# Altium PCB ZET6_PCB.PcbDoc
Units mil, origin at the board's own origin, x right, y up, seen from the top; angles counter-clockwise.
Board outline 3920.03 x 3605.01 mil, 2 copper layers (Top Layer, Bottom Layer); 53 components, 125 nets, 287 pads, 1 vias.
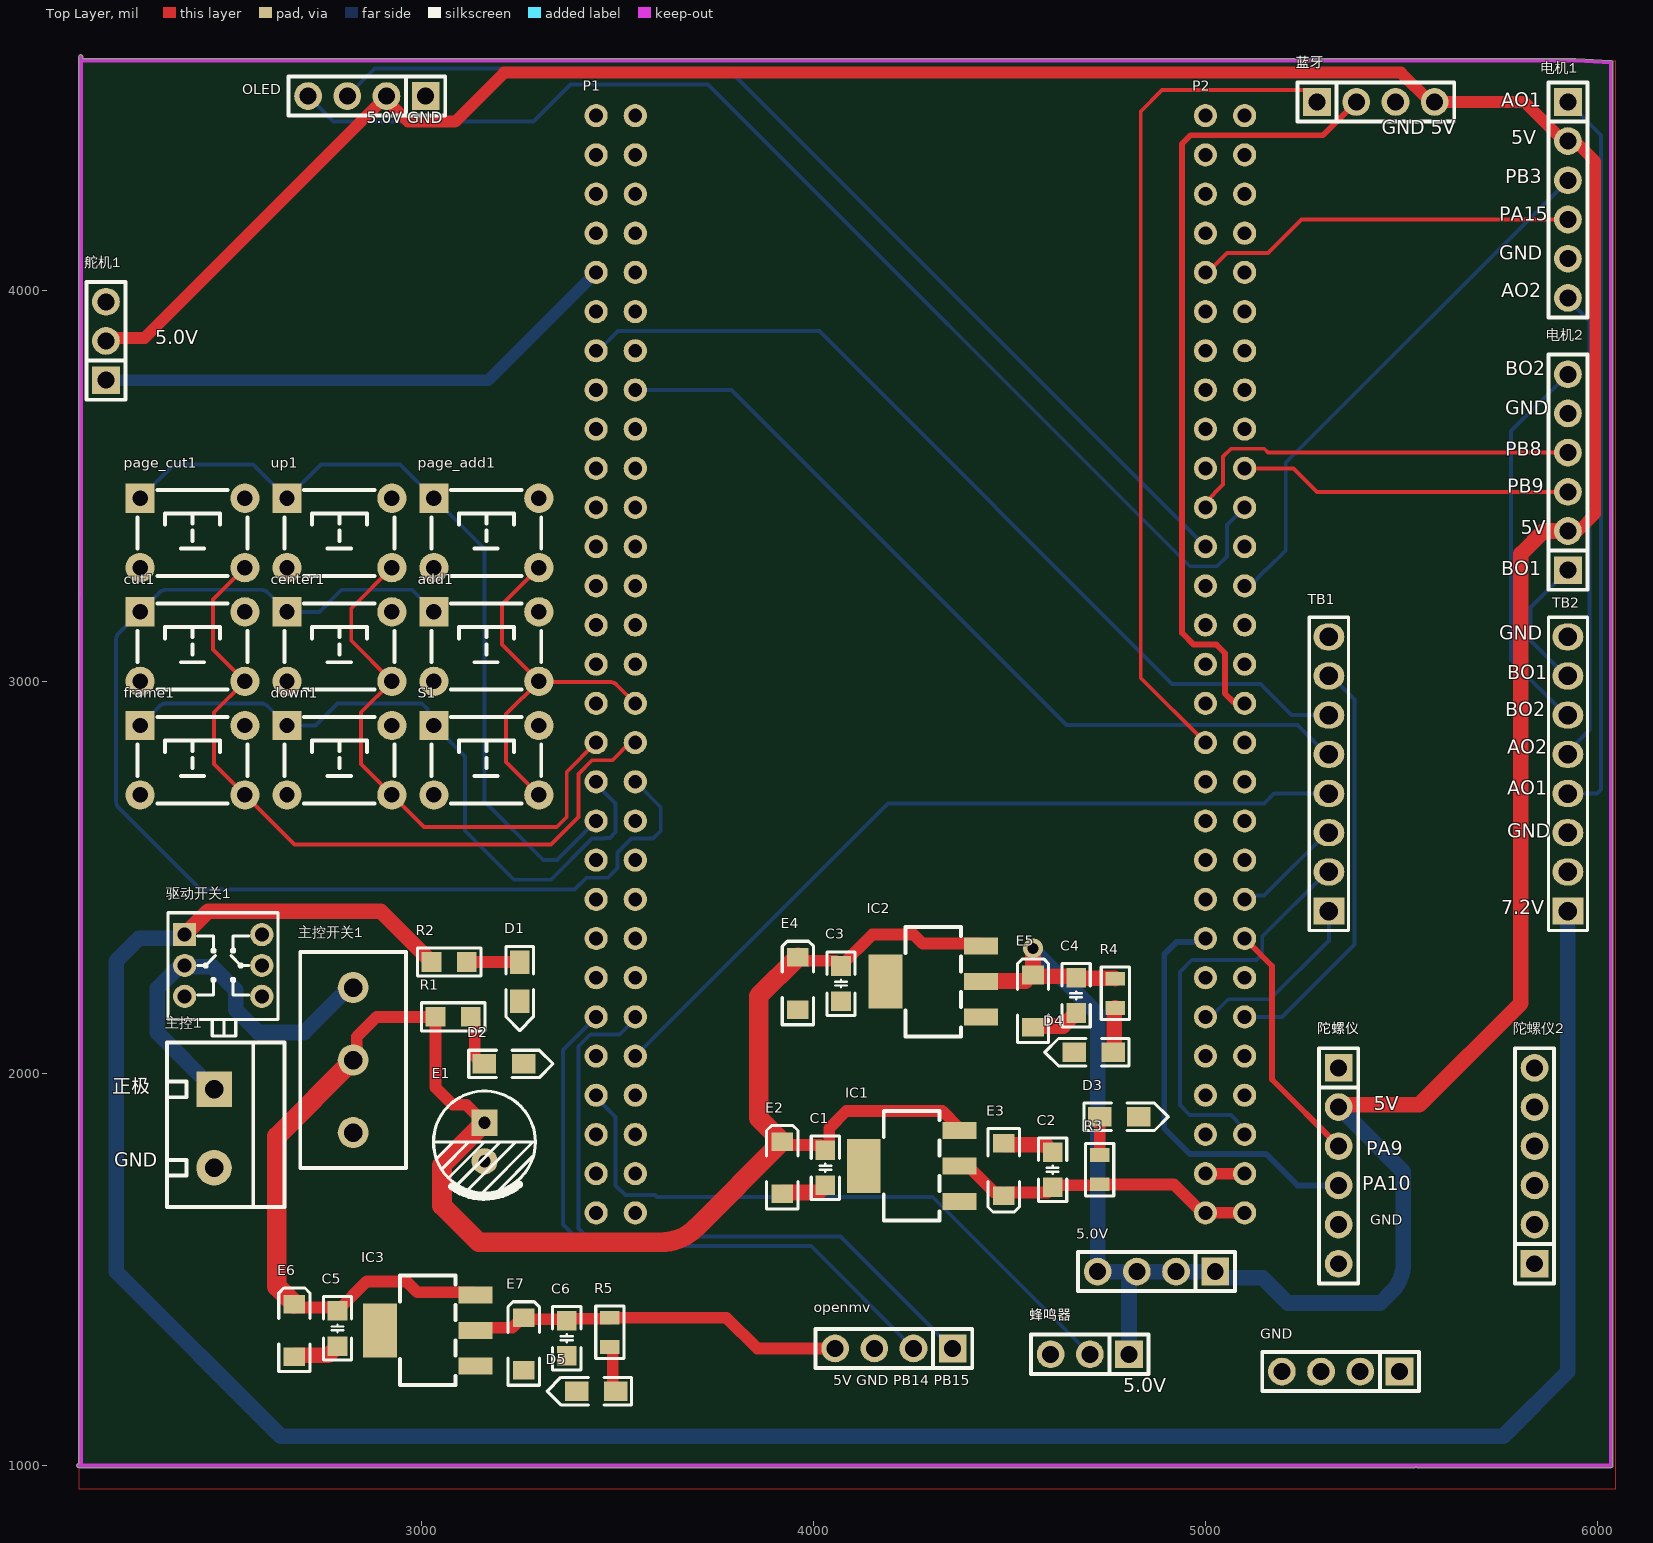
[diagram p0: Top Layer view]
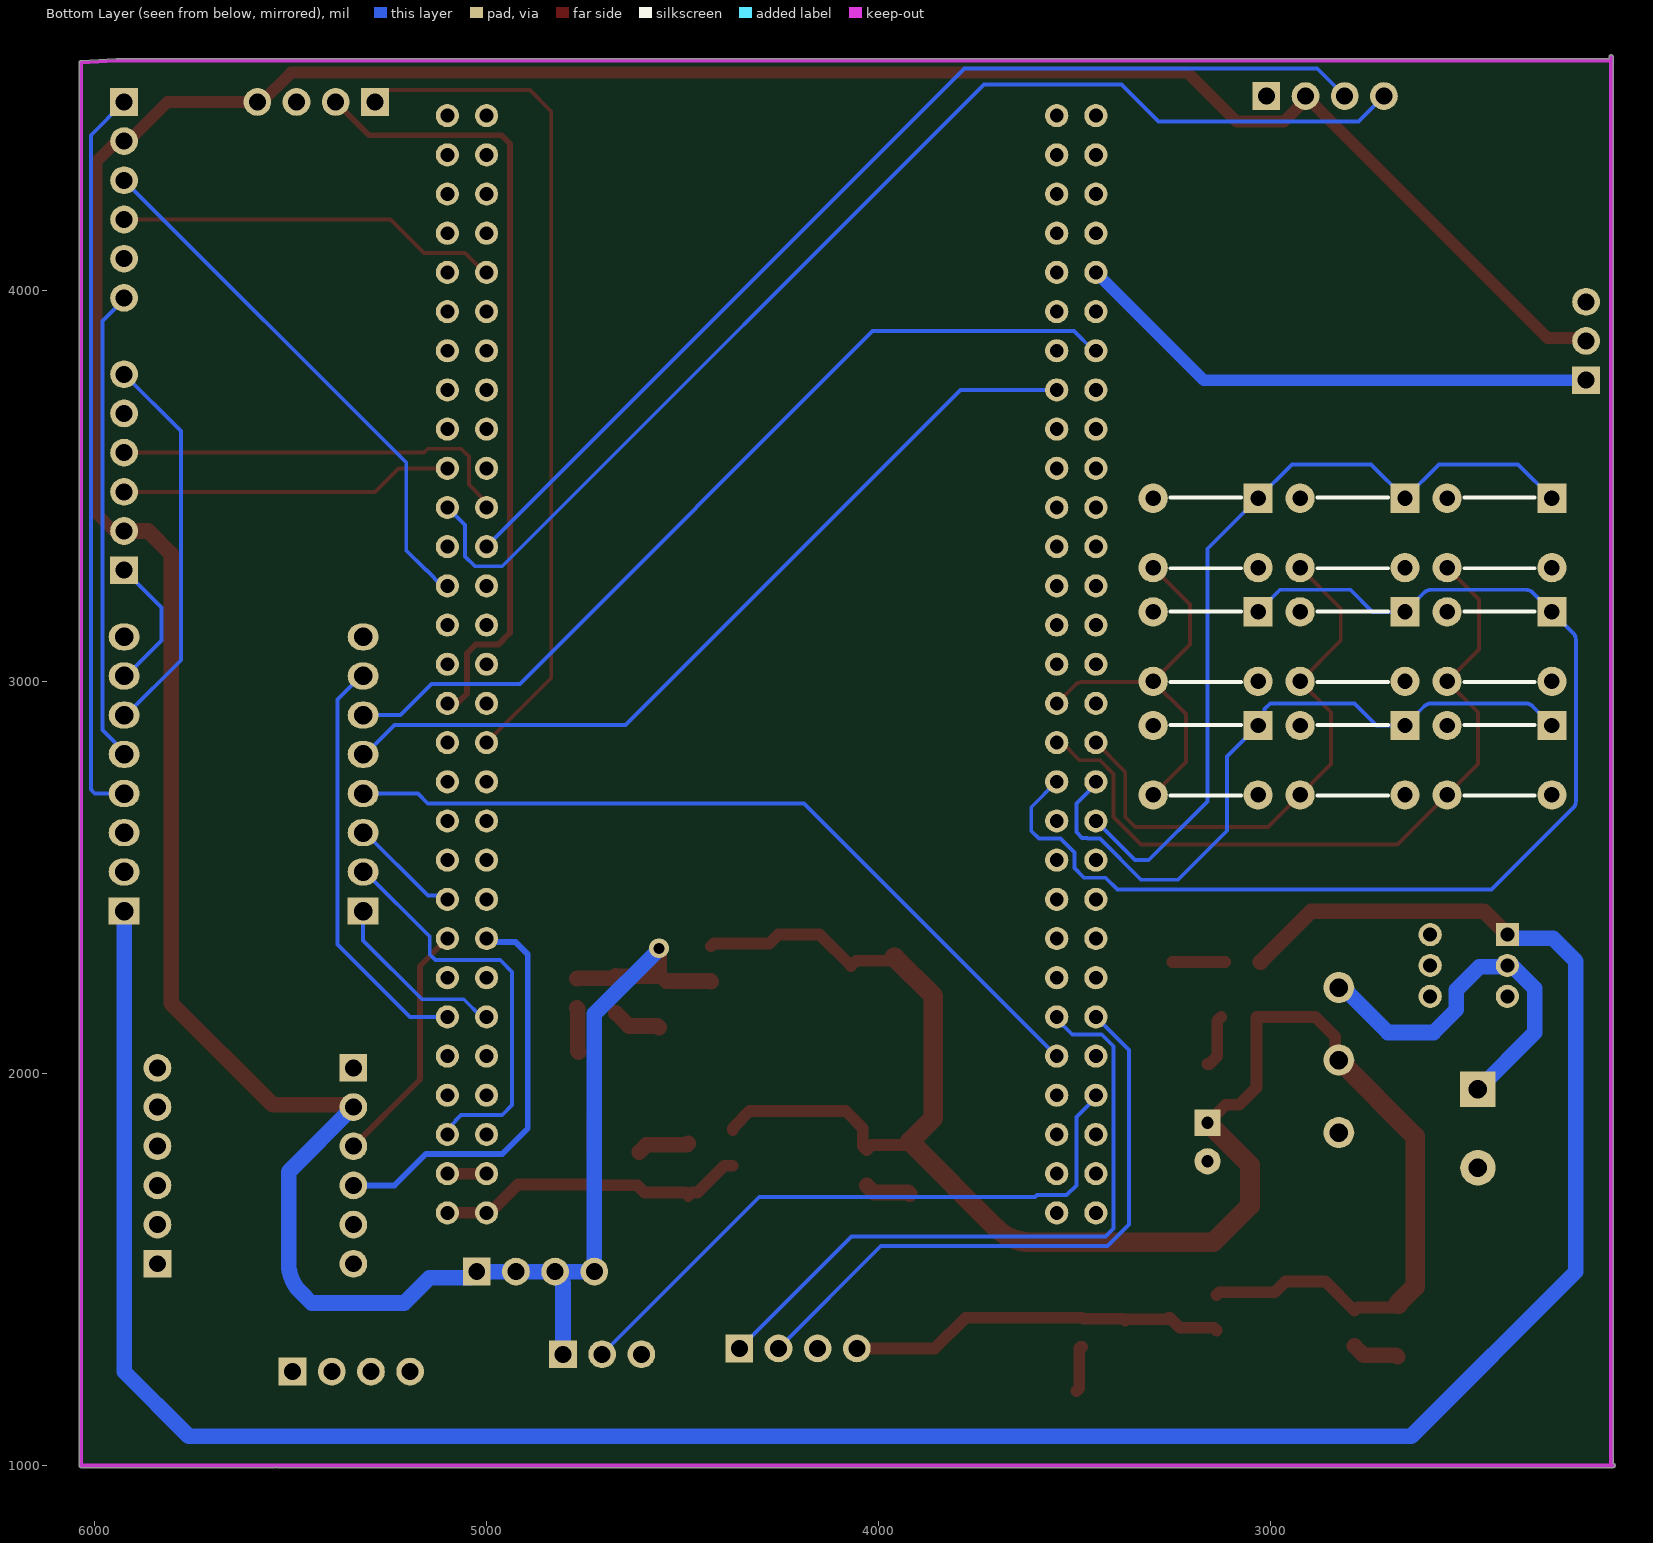
[diagram p1: Bottom Layer view, seen from below]

## Layer stack, top to bottom
Top Solder: solder mask 0.4, Solder Resist, Dk 3.5
Top Layer: signal copper 1.4
Dielectric 1: dielectric 12.6, FR-4, Dk 4.8
Bottom Layer: signal copper 1.4
Bottom Solder: solder mask 0.4, Solder Resist, Dk 3.5

## Board outline
2125,994.98 5535,994.99 ccw(c5535,1000) 5537.5,995.65 ccw(c5540,1000) 5540,994.99 6035,994.99 ccw(c6035,1000) 6038.55,996.45 ccw(c6035,1000) 6040.02,1000 6040.02,1043.75 6040.01,4580 ccw(c6035,4580) 6035.28,4585.01 5945.28,4590.01 ccw(c5945,4585.03) 5945,4590.02 2135.01,4590.02 2135.01,4595 ccw(c2130,4595) 2124.98,4595 2124.98,4265 2124.99,1005.01 ccw(c2125,1000)

## Design rules (kind name [scope] priority, off if disabled: settings)
Clearance [All] p1: gap=10 ignorepadtopadclearanceinfootprint=FALSE except(0: Arc-Hole Track-Hole SMDPad-Hole THPad-Hole Via-Hole Fill-Hole Poly-Hole Region-Hole Text-Hole)
PolygonConnect [All] p1: connectstyle=Relief reliefconductorwidth=10 reliefentries=4 polygonreliefangle="90 Angle" airgapwidth=10
RoutingVias [All] p1: holewidth=28 width=50 viastyle="Through Hole" minholewidth=28 minwidth=50 maxholewidth=28 maxwidth=50
SolderMaskExpansion [All] p1: expansion=4 istentingtop=FALSE
Width [All] p1: maxlimit=100 minlimit=10 preferedwidth=10 minimp=50.000000 maximp=50.000000 favimp=50.000000
30 further rules are at their usual default settings.

## Components (designator, comment, footprint, x,y, rotation, side; value= is the part's Value field where it differs from the comment)
5.0V "5V" JP4 4875,1496 r180 top
add1 "6x6x5" "TSW DIP-6*6*6" 3165,3090 r0 top
C1 "0.1uF" "C 0805_M" 4030,1760 r90 top
C2 "0.1uF" "C 0805_M" 4610,1755 r270 top
C3 "0.1uF" "C 0805_M" 4070,2230 r90 top
C4 "0.1uF" "C 0805_M" 4670,2200 r90 top
C5 "0.1uF" "C 0805_M" 2785,1350 r90 top
C6 "0.1uF" "C 0805_M" 3370,1325 r90 top
center1 "6x6x5" "TSW DIP-6*6*6" 2790,3090 r0 top
cut1 "6x6x5" "TSW DIP-6*6*6" 2415,3090 r0 top
D1 "LED" LED-0805B 3250,2285 r270 top
D2 "LED" LED-0805B 3160,2025 r0 top
D3 "LED" LED-0805R 4730,1890 r0 top
D4 "LED" LED-0805R 4765,2055 r180 top
D5 "LED" LED-0805R 3495,1190 r180 top
down1 "6x6x5" "TSW DIP-6*6*6" 2790,2800 r0 top
E1 "470uF/16V" "CAP 2.5*6.3*11.2 - BK" 3160,1825.79 r270 top
E2 "100uF" "CD A(3216)" 3920,1760 r270 top
E3 "100uF" "CD A(3216)" 4485,1755 r90 top
E4 "100uF" "CD A(3216)" 3960,2230 r270 top
E5 "100uF" "CD A(3216)" 4560,2185 r270 top
E6 "100uF" "CD A(3216)" 2675,1345 r270 top
E7 "100uF" "CD A(3216)" 3260,1310 r270 top
frame1 "6x6x5" "TSW DIP-6*6*6" 2415,2800 r0 top
GND "GND" JP4 5345,1241 r180 top
IC1 "LM1117S-5.0" SOT-223-3_L6.5-W3.4-P2.30-LS7.0-BR 4250,1765 r0 top
IC2 "LM1117S-5.0" SOT-223-3_L6.5-W3.4-P2.30-LS7.0-BR 4305,2235 r0 top
IC3 "LM1117S-5.0" SOT-223-3_L6.5-W3.4-P2.30-LS7.0-BR 3015,1345 r0 top
OLED "Header4" JP4 2860,4496 r180 top (schematic designator oled)
openmv "Header4" JP4 4205,1300 r180 top
P1 "Header 29X2" HDR2X29 3545,1645 r90 top
P2 "Header 29X2" HDR2X29 5100,1645 r90 top
page_add1 "6x6x5" "TSW DIP-6*6*6" 3165,3380 r0 top
page_cut1 "6x6x5" "TSW DIP-6*6*6" 2415,3380 r0 top
R1 "1K" "R 0805_M" 3080,2145 r180 top
R2 "1K" "R 0805_M" 3070,2285 r180 top
R3 "1K" "R 0805_L" 4730,1755 r90 top
R4 "1K" "R 0805_L" 4770,2205 r270 top
R5 "1K" "R 0805_L" 3480,1340 r270 top
S1 "6x6x5" "TSW DIP-6*6*6" 3165,2800 r0 top
TB1 "HDR-1X8" JP8 5315,2415 r90 top
TB2 "HDR-1X8" JP8 5925,2415 r90 top
up1 "6x6x5" "TSW DIP-6*6*6" 2790,3380 r0 top
主控1 "KF301-2P" KF301-5.0-2P 2470,1760 r270 top
主控开关1 "MTS-10x" SS-12D10 2825,2034.96 r270 top
电机1 "Header6" JP6 5925,4230 r270 top
电机2 "Header6" JP6 5925,3535 r90 top
舵机1 "HDR-1X3" jp3 2195,3870 r90 top
蓝牙 "Header4" JP4 5435,4479 r0 top
蜂鸣器 "HDR-1X3" JP3 4705,1285 r180 top
陀螺仪 "Header6" JP6 5340,1765 r270 top
陀螺仪2 "Header6" JP6 5840,1765 r90 top
驱动开关1 "MTS-10x" "KFT DIP-7X7" 2493.43,2276.26 r270 top

## Footprints (in the part's own frame and the unit in brackets; to place one, negate y for a bottom-side part, rotate by r counter-clockwise, add the part's x,y. Pads: shape width x height; smd on the part's side, far side on the other; paste and mask are expansions set on the pad)
"C 0805_M" [mil]
  rect 50x50 smd: 1(-45,0) 2(45,0)
  silkscreen extent -81,-36 81,36, body extent -39,-24 39,24, height 20
"CAP 2.5*6.3*11.2 - BK" [mm] "脚距2.5mm直径6.3mm高度11.2mm"
  rect 1.7x1.7 hole 0.8: 1(-1.25,0)
  round 1.7 hole 0.8: 2(1.25,0)
  silkscreen extent -3.3,-3.3 3.56,3.3, body extent -3.15,-3.15 3.16,3.15, height 11.24
"CD A(3216)" [mm]
  rect 1.2x1.4 smd: 1(-1.7,0) 2(1.7,0)
  silkscreen extent -2.74,-1.02 2.67,1.02, body extent -1.6,-0.8 1.6,0.8, height 1.6
HDR2X29 [mm]
  round 1.5 hole 0.9: 1(0,0) 2(0,2.54) 3(2.54,0) 4(2.54,2.54) 5(5.08,0) 6(5.08,2.54) 7(7.62,0) 8(7.62,2.54) 9(10.16,0) 10(10.16,2.54) 11(12.7,0) 12(12.7,2.54) 13(15.24,0) 14(15.24,2.54) 15(17.78,0) 16(17.78,2.54) 17(20.32,0) 18(20.32,2.54) 19(22.86,0) 20(22.86,2.54) 21(25.4,0) 22(25.4,2.54) 23(27.94,0) 24(27.94,2.54) 25(30.48,0) 26(30.48,2.54) 27(33.02,0) 28(33.02,2.54) 29(35.56,0) 30(35.56,2.54) 31(38.1,0) 32(38.1,2.54) 33(40.64,0) 34(40.64,2.54) 35(43.18,0) 36(43.18,2.54) 37(45.72,0) 38(45.72,2.54) 39(48.26,0) 40(48.26,2.54) 41(50.8,0) 42(50.8,2.54) 43(53.34,0) 44(53.34,2.54) 45(55.88,0) 46(55.88,2.54) 47(58.42,0) 48(58.42,2.54) 49(60.96,0) 50(60.96,2.54) 51(63.5,0) 52(63.5,2.54) 53(66.04,0) 54(66.04,2.54) 55(68.58,0) 56(68.58,2.54) 57(71.12,0) 58(71.12,2.54)
jp3 [mm]
  rect 1.8x1.8 hole 1.1: 1(-2.54,0.025)
  round 1.8 hole 1.1: 2(0,0.025) 3(2.54,0.025)
  silkscreen extent -3.81,-1.24 3.81,1.3
JP3 [mm]
  rect 1.8x1.8 hole 1.1: 1(-2.54,0.025)
  round 1.8 hole 1.1: 2(0,0.025) 3(2.54,0.025)
  silkscreen extent -3.81,-1.24 3.81,1.3
JP4 [mm]
  rect 1.8x1.8 hole 1.1: 1(-3.81,0.025)
  round 1.8 hole 1.1: 2(-1.27,0.025) 3(1.27,0.025) 4(3.81,0.025)
  silkscreen extent -5.08,-1.24 5.08,1.3
JP6 [mm]
  rect 1.8x1.8 hole 1.1: 1(-6.35,0)
  round 1.8 hole 1.1: 2(-3.81,0) 3(-1.27,0) 4(1.27,0) 5(3.81,0) 6(6.35,0)
  silkscreen extent -7.62,-1.27 7.62,1.27
JP8 [mm]
  rect 1.75x2 hole 1.2: 1(0,0)
  oval 1.75x2 hole 1.2: 2(2.54,0) 3(5.08,0) 4(7.62,0) 5(10.16,0) 6(12.7,0) 7(15.24,0) 8(17.78,0)
  silkscreen extent -1.27,-1.27 19.05,1.27
KF301-5.0-2P [mm] "可拼接端子/6A"
  rect 2.3x2.3 hole 1.2: 1(-5.08,0)
  round 2.3 hole 1.2: 2(0,0)
  silkscreen extent -8.13,-3.05 2.54,4.57, body extent -7.95,-3 2.55,4.6, height 10.05
"KFT DIP-7X7" [mm] "自锁开关，规格：7*7mm"
  rect 1.5x1.5 hole 0.9: 1(-2,-2.5)
  round 1.5 hole 0.9: 2(0,-2.5) 3(2,-2.5) 4(2,2.5) 5(0,2.5) 6(-2,2.5)
  silkscreen extent -3.42,-3.58 4.58,3.56, body extent -3.5,-3.5 3.5,3.5, height 11.2
LED-0805B [mil]
  rect 60x50 smd: A(0,0) K(100,0)
  silkscreen extent -40,-35 175,35, body extent 10,-25 89,25, height 32
LED-0805R [mil]
  rect 60x50 smd: A(0,0) K(100,0)
  silkscreen extent -40,-35 175,35, body extent 11,-24 89,25, height 32
"R 0805_L" [mil] "1/8W贴片电阻"
  rect 35x50 smd: 1(-37.4,0) 2(37.4,0)
  silkscreen extent -67,-36 67,36, body extent -39,-25 39,25, height 20
"R 0805_M" [mil] "1/8W贴片电阻"
  rect 50x50 smd: 1(-45,0) 2(45,0)
  silkscreen extent -81,-36 81,36, body extent -39,-25 39,25, height 20
SOT-223-3_L6.5-W3.4-P2.30-LS7.0-BR [mm]
  rect 2.2x1.1 smd: 1(3.099,-2.3) 2(3.099,0) 3(3.099,2.3)
  rect 2.2x3.5 smd: 4(-3.099,0)
  silkscreen extent -1.8,-3.55 1.8,3.55
SS-12D10 [mm] "脚距3mm"
  round 2 hole 1.2: 1(-4.7,0) 2(0,0) 3(4.7,0)
  silkscreen extent -7,-3.43 7,3.43, body extent -7,-3.1 7,3.1, height 9.65
"TSW DIP-6*6*6" [mm] "6*6*6mm"
  rect 1.9x1.9 hole 1: 1(-3.4,2.25)
  round 1.9 hole 1: 2(-3.4,-2.25) 3(3.4,-2.25) 4(3.4,2.25)
  silkscreen extent -3.56,-2.79 3.56,2.79, body extent -4.11,-3 4.11,3, height 5.95

## Part data
5.0V GND: library part Header4
add1 center1 cut1 down1 frame1 page_add1 page_cut1 S1 up1: library part "TSW DIP-6x6", "直插6x6轻触开关", BOM名称=直插6x6轻触开关, 学习资源=www.ooocke.com, 版权归属=源创客
C1 C2 C3 C4 C5 C6: library part C, "无极性贴片电容", BOM名称=无极性贴片电容, 学习资源=www.ooocke.com, 版权归属=源创客
E1: library part C-CAP, "直插电解电容", BOM名称=直插电解电容, 学习资源=www.ooocke.com, 版权归属=源创客
E2 E3 E4 E5 E6 E7: library part C-CD, "贴片钽电容", BOM名称=贴片钽电容, 学习资源=www.ooocke.com, 版权归属=源创客
IC1 IC2 IC3: BOM_JLCPCB SMD=Yes, BOM_Manufacturer=HTC, BOM_Manufacturer Part=LM1117S-5.0, BOM_Supplier=LCSC, BOM_Supplier Part=C126028, SMT Type=Extend, spicePre=U, spiceSymbolName=LM1117S-5.0
R1 R2 R3 R4 R5: library part R, "贴片电阻", BOM名称=贴片电阻, 学习资源=www.ooocke.com, 版权归属=源创客
TB1 TB2: library part "Header 8", "8P接插件", BOM名称=8P接插件, 学习资源=www.ooocke.com, 版权归属=源创客
主控1: "KF301插座", 版权所属="go home"
主控开关1 驱动开关1: "MTS10x系列3脚扭子开关", BOM名称=MTS10x系列3脚扭子开关, 学习资源=www.ooocke.com, 版权归属=源创客
舵机1 蜂鸣器: library part "Header 3", "3P接插件", BOM名称=3P接插件, 学习资源=www.ooocke.com, 版权归属=源创客

## Via types
v1: diameter 50, hole 28, Top Layer to Bottom Layer, 1 vias

## Nets (pads, with @x,y where several pads share a name; then routed paths per layer and width w, separated by ;. In a path a pad name is that pad's centre, name@x,y a point inside that pad or via, vN(x,y) a via of type N, cw(c..) or ccw(c..) an arc to the next point about the centre after c; other vN are vias at no path point)
3.3V芯: P2.3 P2.4 | length 100
  Top Layer w30: P2.4 P2.3
5.0V: 5.0V.1 5.0V.2 5.0V.3 5.0V.4 C4.2 E5.1 IC2.2 OLED.2 R4.1 电机1.2 电机2.2 舵机1.2 蓝牙.4 蜂鸣器.1 陀螺仪.2 | length 9947.4
  Top Layer w30: 舵机1.2 2201.82,3877.82 2292.82,3877.82 OLED.2 2910,4485 2965,4430 3085,4430 3210,4555 5498.94,4555 5573.94,4480 蓝牙.4 5813.94,4480 5913.94,4380 电机1.2 5932.82,4372.18 5951.07,4372.18 5995,4328.25 5995,3428.93 5951.07,3385 电机2.2
  Top Layer w40: IC2.2 4428.65,2236.65 E5.1@4540.79,2236.65 ; v1(4560,2320) E5.1 4563.46,2248.46 C4.2@4666.54,2248.46 ; C4.2@4670,2250 4668.46,2248.46 C4.2@4666.54,2248.46 ; R4.1 4768.7,2243.7 4671.3,2243.7 C4.2 C4.2@4666.54,2248.46 ; 陀螺仪.2 5345.91,1920.91 5545.91,1920.91 5805,2180 5805,3326.42 5863.58,3385 电机2.2
  Bottom Layer w40: v1(4560,2320) 4560,2317.29 4725,2152.29 5.0V.4 5.0V.3 ; 蜂鸣器.1 4805,1466.65 4825,1486.65 5.0V.3 ; 陀螺仪.2 5505,1750 5505,1515 cw(c5405,1515) 5475.71,1444.29 5446.42,1415 5210,1415 5145.43,1479.57 5040.43,1479.57 5.0V.1 5.0V.2 5.0V.3
5.0V摄像头: C6.2 E7.1 IC3.2 openmv.4 R5.1 | length 969.6
  Top Layer w30: IC3.2 3143.65,1351.65 3230.79,1351.65 3256.06,1376.93 E7.1 3263.46,1373.46 3366.54,1373.46 C6.2 3374.9,1374.9 3477.5,1374.9 R5.1 3777.6,1377.4 3856,1299 openmv.4
5.0V芯: C2.2 E3.1 IC1.2 P2.1 P2.2 R3.1 | length 802.2
  Top Layer w30: IC1.2 4393.65,1765 4461.96,1696.69 4476.38,1696.69 E3.1 4493.62,1696.69 4596.69,1696.69 C2.2 4615.1,1715.1 4727.5,1715.1 R3.1 4919.54,1717.6 4992.14,1645 P2.2 P2.1
7.2V: R2.2 TB2.1 驱动开关1.1 | length 6826.1
  Top Layer w40: 驱动开关1.1 2455,2415 2895,2415 R2.2
  Bottom Layer w40: 驱动开关1.1 2385.47,2345.47 2278.58,2345.47 2220,2286.89 2220,1495 2640,1075 5760,1075 5925,1240 TB2.1
+7.2V: C1.2 C3.2 C5.2 E1.1 E2.1 E4.1 E6.1 IC1.3 IC2.3 IC3.3 R1.2 主控开关1.2 | length 4740.7
  Top Layer w30: E6.1 2683.46,1403.46 2776.54,1403.46 C5.2 2860,1470 2960.9,1470 2988.69,1442.2 3130.35,1442.2 IC3.3 ; 主控开关1.2 2834.33,2044.29 2834.33,2094.33 2885,2145 R1.2 3035,1965 3078.93,1921.07 3113.93,1921.07 E1.1 ; E2.1 3928.62,1818.31 4016.69,1818.31 C1.2 4040,1815 4040,1861.07 4083.93,1905 4328.07,1905 4372,1861.07 IC1.3 ; E4.1 3968.62,2288.31 4056.69,2288.31 C3.2 4150,2355 4255.9,2355 4278.69,2332.2 4420.35,2332.2 IC2.3
  Top Layer w50: E6.1 2673.82,1411.93 2672.44,1413.31 2672.44,1414.49 2630,1456.93 2630,1839.96 主控开关1.2 ; E1.1 3051.78,1766.78 3051.78,1663.22 3145,1570 3611.29,1570 ccw(c3611.29,1695) 3699.59,1606.52 E2.1 3860,1886.93 3860,2198.11 3958.82,2296.93 E4.1
AO1: TB2.4 电机1.1 | length 1879.4
  Bottom Layer w10: TB2.4 6000,2715 6010,2725 6010,4395 电机1.1
AO2: TB2.5 电机1.6 | length 1210.6
  Bottom Layer w10: TB2.5 5925,2822.28 5980,2877.28 5980,3921.25 5925,3976.25 电机1.6
BO1: TB2.7 电机2.1 | length 351.6
  Bottom Layer w10: TB2.7 5920.08,3015 5830,3105.08 5830,3190 电机2.1
BO2: TB2.6 电机2.6 | length 993
  Bottom Layer w10: TB2.6 5920.08,2915 5780,3055.08 5780,3640 电机2.6
GND: C1.1 C2.1 C3.1 C4.1 C5.1 C6.1 D1.K D2.K D3.K D4.K D5.K E1.2 E2.2 E3.2 E4.2 E5.2 E6.2 E7.2 GND.1 GND.2 GND.3 GND.4 IC1.1 IC2.1 IC3.1 OLED.1 openmv.3 P1.1 P1.2 P1.3 P1.4 TB1.8 TB2.3 TB2.8 主控1.2 电机1.5 电机2.5 舵机1.3 蓝牙.3 蜂鸣器.3 陀螺仪.5 | length 499.6
  Top Layer w40: E6.2 2678.62,1281.69 2761.69,1281.69 C5.1 ; E2.2 3923.62,1696.69 4011.69,1696.69 C1.1 ; E3.2 4488.62,1818.31 4591.69,1818.31 C2.1 ; E5.2 4563.62,2121.69 4636.69,2121.69 C4.1
NetD1_A: D1.A R2.1 | length 135
  Top Layer w30: R2.1 D1.A
NetD2_A: D2.A R1.1 | length 137.4
  Top Layer w30: R1.1 3135,2135 3135,2045 3155,2025 D2.A
NetD3_A: D3.A R3.2 | length 97.6
  Top Layer w30: R3.2 D3.A
NetD4_A: D4.A R4.2 | length 114.7
  Top Layer w40: D4.A 4767.5,2057.5 4767.5,2165.1 R4.2
NetD5_A: D5.A R5.2 | length 125.3
  Top Layer w30: R5.2@3482.5,1300.1 R5.2 3485,1302.6 3487.5,1300.1 3487.5,1197.5 D5.A
Net主控1_2: 主控1.1 主控开关1.1 驱动开关1.2 | length 990.1
  Bottom Layer w40: 主控1.1 2325,2105 2325,2217.68 2383.58,2276.26 驱动开关1.2 2398.65,2272.61 2466.42,2272.61 2525,2214.04 2525,2163.58 2583.58,2105 2699.52,2105 2814.52,2220 主控开关1.1
PA0: P1.49
PA1: P1.50 舵机1.1 | length 1372
  Top Layer w10: 舵机1.1 舵机1.1@2199,3775
  Bottom Layer w30: 舵机1.1 3170,3770 P1.50
PA2: P1.47
PA3: P1.41
PA4: P1.42
PA5: P1.39
PA6: P1.40
PA7: P1.37
PA8: P2.17 TB1.3 | length 285.4
  Bottom Layer w10: P2.17 5109.39,2454.39 5149.46,2454.39 5310.08,2615 TB1.3
PA9: P2.15 陀螺仪.3 | length 644.5
  Top Layer w15: P2.15 5170,2275 5170,1985 陀螺仪.3
  Bottom Layer w15: 陀螺仪.3@5340,1799.88 陀螺仪.3
PA10: P2.16 陀螺仪.4 | length 1071.6
  Bottom Layer w15: P2.16 4991.57,2336.57 4926.57,2336.57 4895,2305 4895,1860 4960,1795 5155,1795 5235,1715 陀螺仪.4
PA11: P2.5 TB1.2 | length 1057
  Bottom Layer w10: P2.5 5100,1858.27 5079.64,1878.63 5079.64,1880.36 5065,1895 4960,1895 4935,1920 4935,2260 4965,2290 5130.36,2290 5145,2304.64 5145,2349.92 5310.08,2515 TB1.2
PA12: P2.6
PA15: P2.50 电机1.4 | length 980.9
  Top Layer w10: P2.50 5005.4,4045 5055.4,4095 5160,4095 5245,4180 电机1.4
PB0: P1.43 TB1.5 | length 2155.2
  Bottom Layer w10: P1.43 3790,3745 4645,2890 5235.08,2890 5310.08,2815 TB1.5
PB1: P1.46 TB1.6 | length 2296.6
  Bottom Layer w10: P1.46 3450.4,3845 3500.4,3895 4015,3895 4915,2995 5140,2995 5220,2915 TB1.6
PB2: P1.35
PB3: P2.33 电机1.3 | length 1385.5
  Bottom Layer w10: P2.33 5113.27,3245 5153.27,3285 5155,3285 5205,3335 5205,3560 电机1.3
PB4: P2.34
PB5: P2.35
PB6: OLED.3 P2.36 | length 2724.3
  Bottom Layer w10: OLED.3 2880,4565 3780,4565 P2.36
PB7: OLED.4 P2.37 | length 3074.8
  Bottom Layer w10: OLED.4 2775,4430 3285,4430 3380,4525 3730,4525 4960,3295 5030,3295 5055,3320 5055,3400 P2.37
PB8: P2.38 电机2.4 | length 1041.1
  Top Layer w10: P2.38 5000,3458.27 5045,3503.27 5045,3575 5065,3595 5150,3595 5160,3585 电机2.4
PB9: P2.39 电机2.3 | length 849.9
  Top Layer w10: P2.39 5225,3545 5285,3485 电机2.3
PB10: P1.21
PB11: P1.20
PB12: P1.14
PB13: P1.13
PB14: openmv.2 P1.12 | length 1591.1
  Bottom Layer w10: P1.12 3360,2060 3360,1615 3415,1560 3994,1560 openmv.2
PB15: openmv.1 P1.11 | length 1726
  Bottom Layer w10: P1.11 3545,2139.64 3505.36,2100 3430,2100 3400,2070 3400,1605 3420,1585 4069,1585 openmv.1
PC0: P1.56
PC1: P1.55
PC2: P1.58
PC3: P1.57
PC4: P1.38
PC5: P1.44
PC6: P2.12 TB1.1 | length 470.8
  Bottom Layer w10: P2.12 5013.27,2145 5058.27,2190 5165,2190 5315,2340 TB1.1
PC7: P2.11 TB1.7 | length 1071.4
  Bottom Layer w10: P2.11 5195,2145 5380,2330 5380,2954.92 5319.92,3015 TB1.7
PC8: P2.14
PC9: P2.13
PC10: P2.18
PC11: P2.19
PC12: P2.20
PC13: P2.51
PD0: P2.21
PD1: P2.22
PD2: P2.23
PD3: P2.24
PD4: P2.25
PD5: P2.26 蓝牙.1 | length 2164.4
  Top Layer w10: P2.26 4835,3010 4835,4455.87 4889.57,4510.43 5254.57,4510.43 蓝牙.1
PD6: P2.27 蓝牙.2 | length 2032.3
  Top Layer w15: P2.27 5096.97,2948.03 5071.97,2948.03 5050,2970 5050,3073.03 5028.03,3095 4970,3095 4940,3125 4940,4373.03 4961.97,4395 5300,4395 蓝牙.2
PD7: P2.28
PD8: P1.10
PD9: P1.9 TB1.4 | length 2047.5
  Bottom Layer w10: P1.9 4190,2690 5150,2690 5175,2715 TB1.4
PD10: P1.8 蜂鸣器.2 | length 1639.2
  Bottom Layer w10: P1.8 3445,1939.6 3495,1889.6 3495,1715 3520,1690 3595,1690 3600,1685 4304,1685 蜂鸣器.2
PD11: P1.7
PD12: P1.6
PD13: P1.5
PD14: P1.15
PD15: P1.16
PE0: P2.41
PE1: P2.40
PE2: P2.45
PE3: P2.46
PE4: P2.47
PE5: P2.48
PE6: P2.49
PE7: P1.29
PE8: P1.30
PE9: P1.28
PE10: add1.3 P1.27 page_add1.3 S1.3 | length 1012.8
  Top Layer w10: page_add1.3 3205,3197.56 3205,3095.28 add1.3 ; S1.3@3316.39,2711.42 S1.3 3215,2795.28 3215,2917.56 add1.3 ; P1.27 3497.32,2992.68 ccw(c3479.64,2975) 3479.64,3000 3307.09,3000 cw(c3307.16,3025) add1.3
PE11: center1.3 down1.3 P1.26 up1.3 | length 1442.4
  Top Layer w10: up1.3 2820,3187.56 2820,3105.28 center1.3 2845,2922.56 2845,2790.28 down1.3 3005.28,2630 3344.64,2630 3370,2655.36 3370,2770 P1.26
PE12: cut1.3 frame1.3 P1.25 page_cut1.3 | length 1933.2
  Top Layer w10: page_cut1.3 2467.44,3210 2467.44,3082.83 cut1.3 2470,2922.56 2470,2790.28 frame1.3 2675.28,2585 3329.64,2585 3400,2655.36 3400,2765 3435,2800 3486.73,2800 3531.73,2845 P1.25
PE13: down1.1 frame1.1 P1.24 S1.1 | length 1793.6
  Bottom Layer w10: frame1.1 2330.24,2937.68 cw(c2347.91,2920) 2347.91,2945 2589.37,2945 cw(c2589.37,2920) 2607.05,2937.68 down1.1 2728.58,2888.58 2785,2945 3000,2945 3014.64,2930.36 3014.64,2905.08 S1.1 3110,2809.72 3110,2620 3235,2495 3330,2495 3435,2600 3465.36,2600 3467.32,2601.97 3480.36,2601.97 3495,2616.61 3495,2689.6 3445,2739.6 P1.24
PE14: add1.1 center1.1 cut1.1 P1.23 | length 3074.8
  Bottom Layer w10: add1.1 2974.72,3235 2795,3235 2738.58,3178.58 center1.1 2607.05,3227.68 ccw(c2589.37,3210) 2589.37,3235 2347.91,3235 ccw(c2347.91,3210) 2330.24,3227.68 cut1.1 2227.32,3124.76 ccw(c2245,3107.09) 2220,3107.09 2220,2695.36 ccw(c2245,2695.36) 2227.32,2677.68 2435,2470 3390,2470 3420,2500 3475,2500 3500,2525 3500,2565 3535,2600 3590.36,2600 3610,2619.64 3610,2680 P1.23
PE15: P1.22 page_add1.1 page_cut1.1 up1.1 | length 2114.1
  Bottom Layer w10: page_cut1.1 2367.56,3555 2569.72,3555 up1.1 2742.56,3555 2944.72,3555 page_add1.1 3160,3339.72 3160,2695 3310,2545 3345,2545 P1.22 P1.22@3445,2650.4
PF0: P2.52
PF1: P2.53
PF2: P2.54
PF3: P2.55
PF4: P2.56
PF5: P2.57
PF6: P2.58
PF7: P1.52
PF8: P1.51
PF9: P1.54
PF10: P1.53
PF11: P1.36
PF12: P1.33
PF13: P1.45
PF14: P1.48
PF15: P1.34
PG0: P1.31
PG1: P1.32
PG2: P1.17
PG3: P1.18
PG4: P1.19
PG5: P2.8
PG6: P2.7
PG7: P2.10
PG8: P2.9
PG9: P2.29
PG10: P2.30
PG11: P2.31
PG12: P2.44
PG13: P2.43
PG14: P2.42
PG15: P2.32
pads on no net: add1.2 add1.4 center1.2 center1.4 cut1.2 cut1.4 down1.2 down1.4 frame1.2 frame1.4 IC1.4 IC2.4 IC3.4 page_add1.2 page_add1.4 page_cut1.2 page_cut1.4 S1.2 S1.4 TB2.2 up1.2 up1.4 主控开关1.3 陀螺仪2.1 陀螺仪2.2 陀螺仪2.3 陀螺仪2.4 陀螺仪2.5 陀螺仪2.6 陀螺仪.1 陀螺仪.6 驱动开关1.3 驱动开关1.4 驱动开关1.5 驱动开关1.6

## Polygon pours and split planes (outlines as drawn)
GND on Top Layer "Bottom Layer-No Net" (solid, shelved, pour order 0): 2130.43,4584.57 6045.43,4584.57 6045.43,939.57 2125.43,939.57

## Keep-outs
Keep-Out Layer:
  lines w10: 2125,1000 5535,1000 ; 2130,1000 2130,4265 2130,4595 ; 2135,4585 5945,4585 6035,4580 6035,1043.75 6035,1000 ; 5540,1000 5860,1000 6035,1000 ; 6035,1000 6035,1000

## Silkscreen, mask and mechanical layers (free items; w line width, h text height)
Top Overlay:
  text "AO1" at 5755,4455.62 h60
  text "5.0V GND" at 2860,4415.52 h50
  text "GND 5V" at 5450,4385.62 h60
  text "5V" at 5780,4360.62 h60
  text "PB3" at 5765,4260.67 h60
  text "PA15" at 5750,4165.62 h60
  text "GND" at 5750,4065.62 h60
  text "AO2" at 5755,3970.62 h60
  text "5.0V" at 2320,3850.62 h60
  text "BO2" at 5765,3770.62 h60
  text "GND" at 5765,3670.62 h60
  text "PB8" at 5765,3565.62 h60
  text "PB9" at 5770,3470.62 h60
  text "5V" at 5805,3365.62 h60
  text "BO1" at 5755,3260.62 h60
  text "GND" at 5750,3095.62 h60
  text "BO1" at 5770,2995.62 h60
  text "BO2" at 5765,2900.62 h60
  text "AO2" at 5770,2805.62 h60
  text "AO1" at 5770,2700.62 h60
  text "GND" at 5770,2590.62 h60
  text "7.2V" at 5755,2395 h60
  text "正极" at 2210.04,1940.24 h60
  text "5V" at 5430,1895.62 h60
  text "PA9" at 5410,1780.62 h60
  text "GND" at 2215,1750.62 h60
  text "PA10" at 5400,1690.62 h60
  text "GND" at 5420,1605.47 h45
  text "5V GND PB14 PB15" at 4050,1195.47 h45
  text "5.0V" at 4790,1175.62 h60